# Allegro board iTOP4412_convertor_4.3Clasics_v1_5.brd
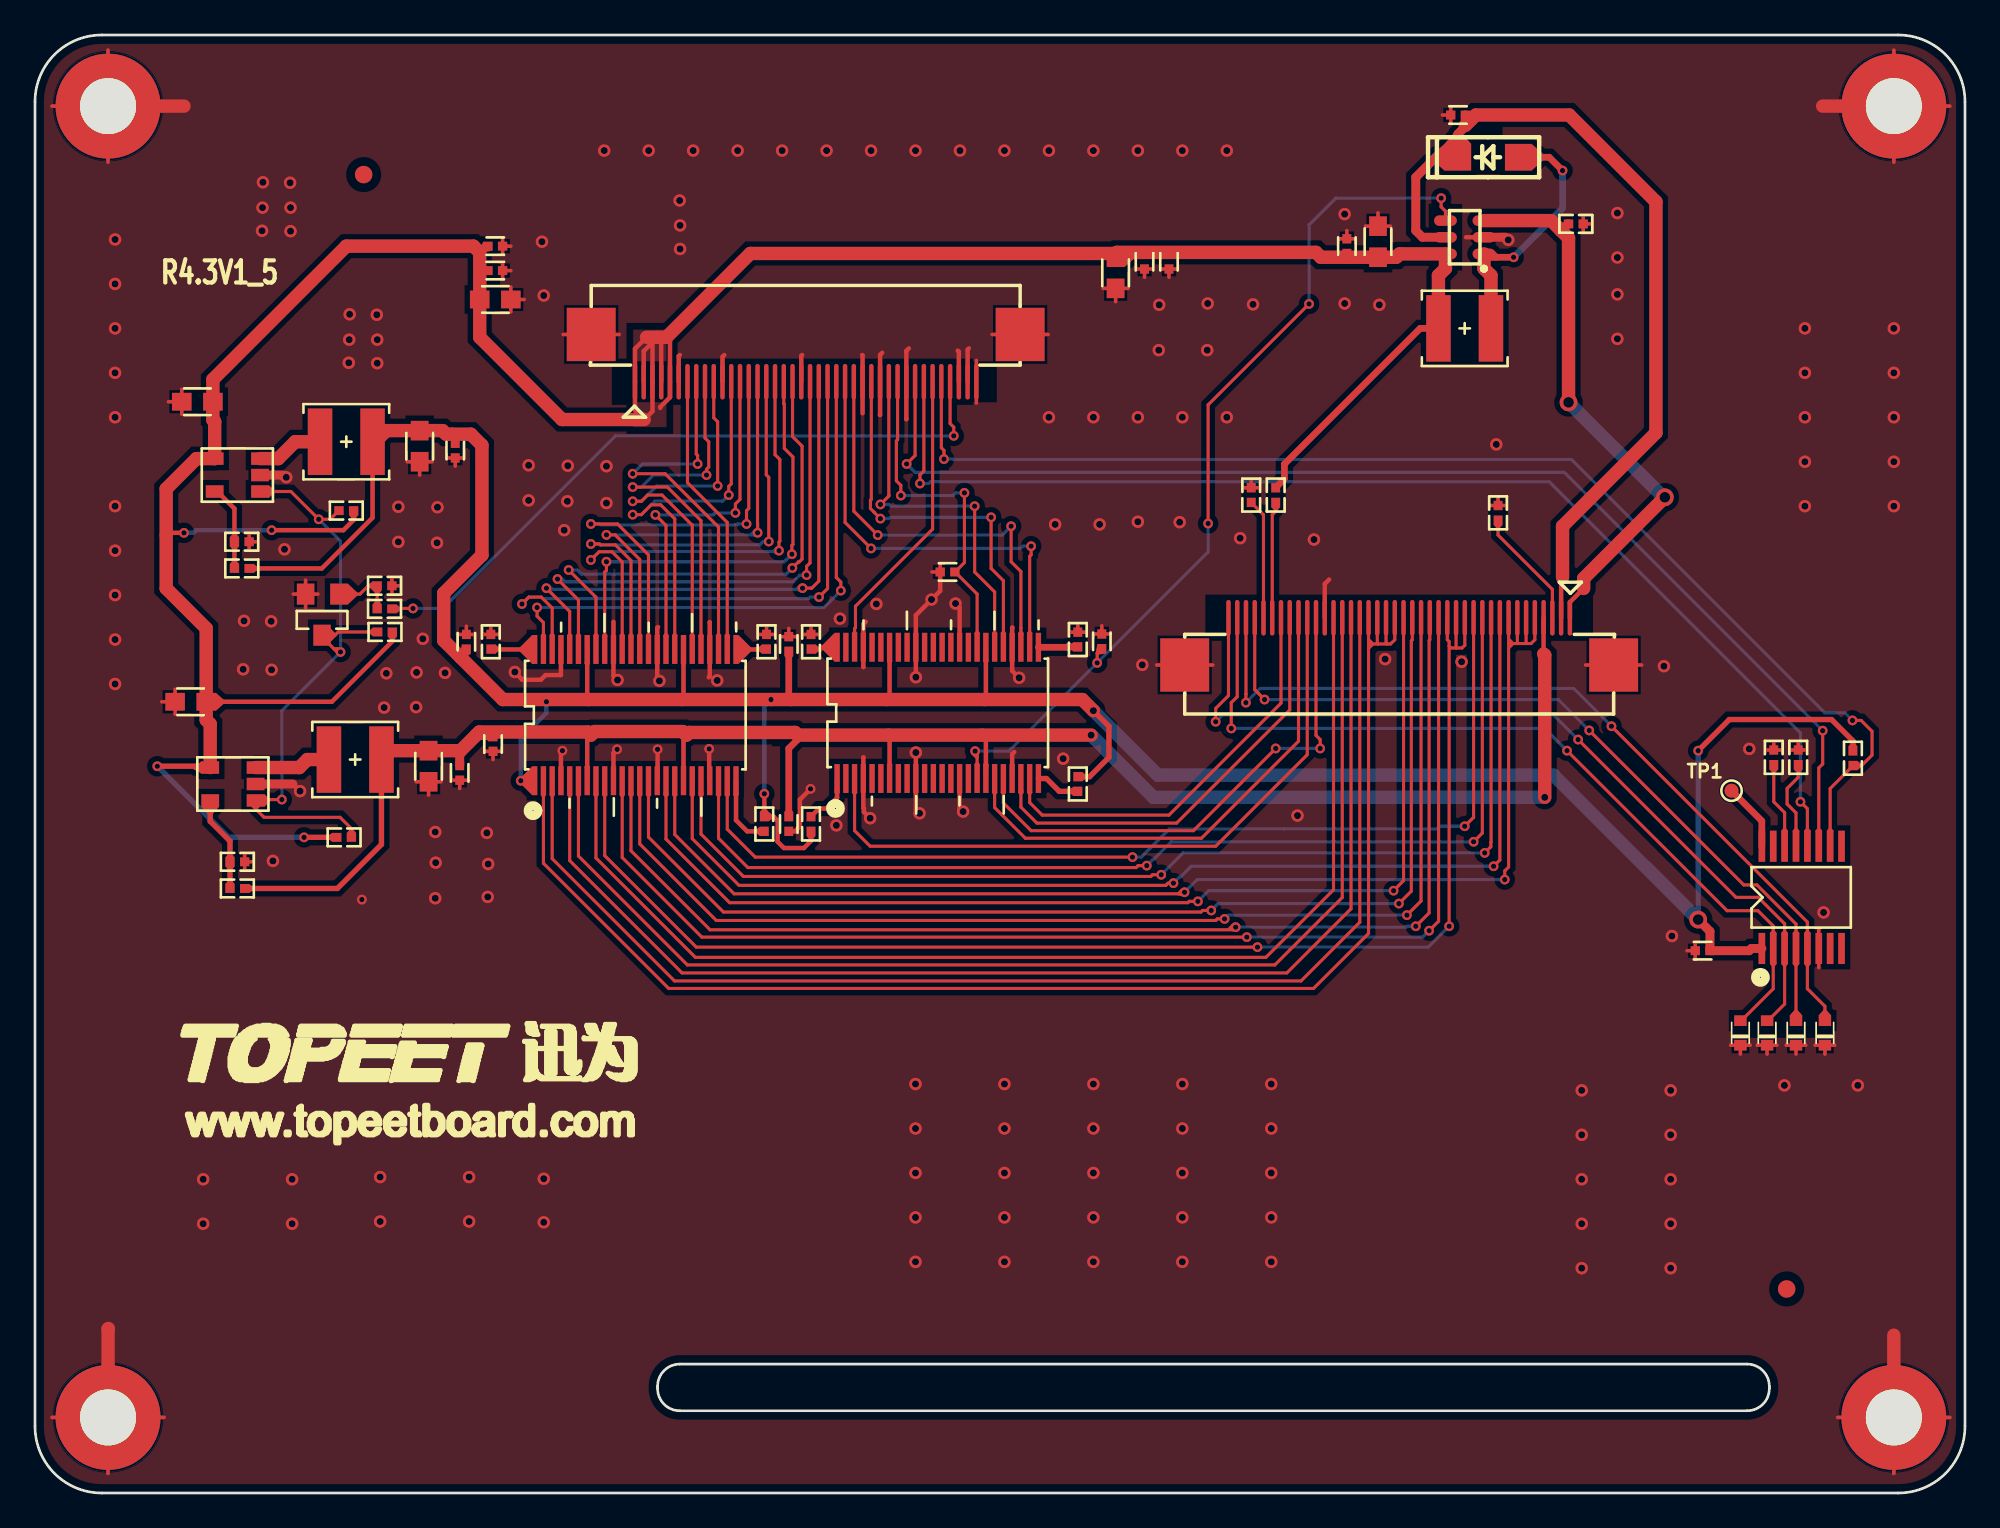
[diagram p0: board, top side]
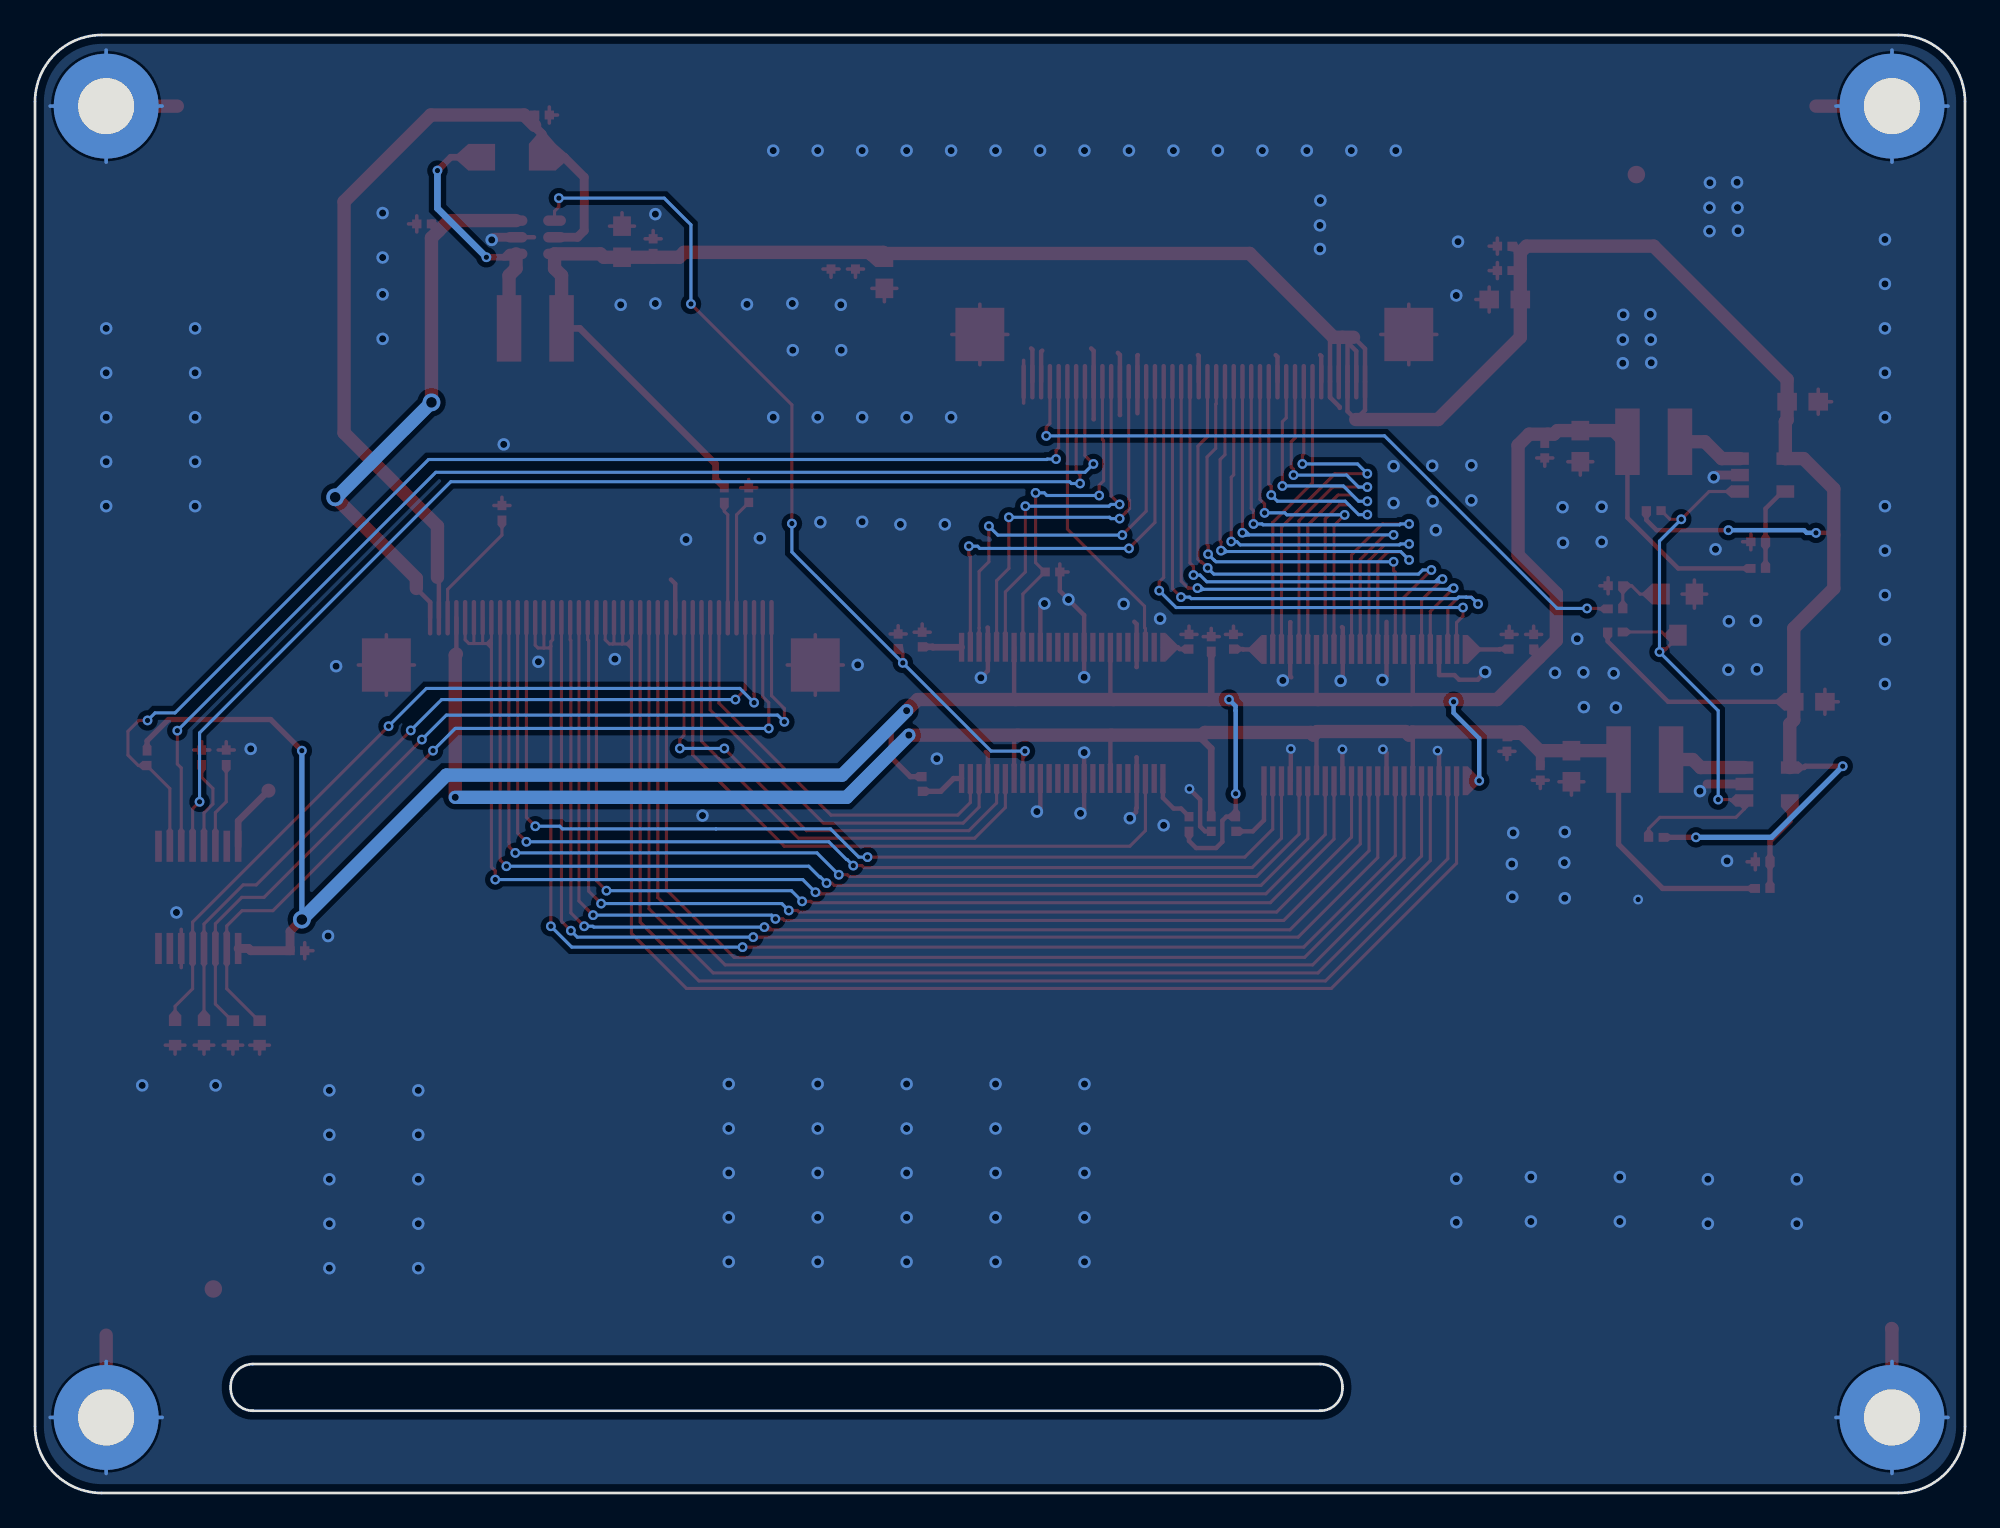
[diagram p1: board, bottom side, seen from below]

Outline 110.24 x 83.31 mm; copper layers: TOP, BOTTOM. Coordinates in mm from the lower left corner of the outline.
Outline path: 0,79.5 arc(1.12,82.2) 3.81,83.31 106.43,83.31 arc(109.12,82.2) 110.24,79.5 110.24,3.81 arc(109.12,1.12) 106.43,0 3.81,0 arc(1.12,1.12) 0,3.81 0,79.5 ; 35.56,6.1 35.56,5.97 arc(35.93,5.07) 36.83,4.7 97.79,4.7 arc(98.69,5.07) 99.06,5.97 99.06,6.1 arc(98.69,6.99) 97.79,7.37 36.83,7.37 arc(35.93,6.99) 35.56,6.1

## Design rules (mm)
net group PWR_PH: nets DC33V
nets with their own width: min track width 0.254; nets GND VSYS

## Placement (name value [footprint] x y rotation side)
C1  10uF/16V  [C0603]  76.71 71.5 90 top
C2  0.1uF  [C0402]  74.93 71.25 270 top
C3  1uF/25V  [C0402]  81.28 78.74 0 top
C5  4.7uF  [C0603]  9.27 62.36 0 top
C6  10uF  [C0603]  21.97 59.82 90 top
C7  0.1uF  [C0402]  24 59.56 90 top
C8  4.7uF  [C0603]  8.89 45.21 0 top
C9  10uF  [C0603]  22.48 41.53 90 top
C10  0.1uF  [C0402]  24.26 41.15 90 top
C11  10uF  [C0603]  26.29 68.2 0 top
C12  1uF  [C0402]  26.29 69.85 0 top
C13  0.1uF  [C0402]  26.29 71.25 0 top
C14  10uF  [C0603]  61.72 69.72 270 top
C15  100nF  [C0402]  64.77 70.36 270 top
C16  100nF  [C0402]  63.37 70.36 270 top
C17  0.1uF  [C0402]  95.25 30.99 180 top
C18  0.1uF  [C0402]  24.64 48.64 90 top
C19  0.1uF  [C0402]  43.05 48.51 90 top
C20  0.1uF  [C0402]  43.05 38.23 270 top
C21  0.1uF  [C0402]  26.16 42.8 270 top
C22  0.1uF  [C0402]  60.93 48.67 270 top
C23  0.1uF  [C0402]  52.12 52.63 0 top
CON1  CON40_0_5MM  [FPC40-050]  44.02 63.5 0 top
CON2  CON40_0_5MM  [FPC40-050]  77.92 50.01 180 top
D1  IN5819  [D1206]  82.99 76.33 0 top
D2  BZX84C10/SOT  [SOD-523]  102.23 26.29 90 top
D3  BZX84C10/SOT  [SOD-523]  98.93 26.29 90 top
D4  BZX84C10/SOT  [SOD-523]  100.58 26.29 90 top
D5  BZX84C10/SOT  [SOD-523]  97.41 26.29 90 top
H1  TP_P0_0.8_D0  [HOLE3_2X6]  4.17 79.25 0 top
H2  TP_P0_0.8_D0  [HOLE3_2X6]  106.17 4.32 0 top
H3  TP_P0_0.8_D0  [HOLE3_2X6]  106.17 79.25 0 top
H4  TP_P0_0.8_D0  [HOLE3_2X6]  4.17 4.32 0 top
L1  10uH  [IND4018]  81.66 66.55 0 top
L2  2.2uH  [IND4018]  17.78 60.07 0 top
L3  2.2uH  [IND4018]  18.29 41.91 0 top
NOREF  -  [unnamed]  100.05 11.66 0 top
NOREF#2  -  [unnamed]  18.77 75.34 0 top
Q1  L9014  [SOT-23]  16.4 50.2 0 top
R1  5.1R  [R0402]  88.01 72.52 0 top
R3  ? 1%  [R0402]  11.81 52.83 180 top
R8  ? 1%  [R0402]  11.81 54.36 0 top
R9  430K 1%  [R0402]  11.56 34.54 180 top
R10  100K 1%  [R0402]  11.56 36.07 0 top
R11  0R  [R0402]  100.71 42.04 90 top
R12  0R  [R0402]  99.31 42.04 90 top
R13  10K  [R0402]  103.84 41.99 90 top
R15  NC  [R0402]  17.78 56.13 0 top
R16  NC  [R0402]  17.65 37.47 180 top
R17  10K/NC  [R0402]  83.57 56.01 90 top
R18  0R  [R0402]  70.87 57.02 90 top
R19  10K/NC  [R0402]  69.47 57.02 90 top
R20  10K  [R0402]  26.03 48.64 90 top
R21  10K  [R0402]  44.32 38.23 270 top
R22  10K  [R0402]  44.32 48.64 270 top
R23  10K  [R0402]  59.56 40.51 90 top
R24  10K  [R0402]  41.66 38.23 90 top
R25  10K  [R0402]  59.56 48.77 90 top
R26  10K  [R0402]  41.78 48.64 90 top
R27  10K  [R0402]  19.99 49.2 180 top
R28  1K  [R0402]  19.96 50.52 0 top
R29  10K  [R0402]  19.96 51.84 0 top
TP1  AUX  [TP0_8-SMD]  96.9 40.13 0 top
U1  TP3984  [SOT23-6L]  81.66 71.76 90 top
U3  RT8059  [TSOT-23-5]  11.56 58.17 90 top
U4  RT8059  [TSOT-23-5]  11.3 40.51 90 top
U5  TSC2007IPW  [TSSOP16]  100.58 34.04 90 top
U6  U-74ALVC164245DGG  [TSSOP_48]  34.29 44.45 0 top
U7  U-74ALVC164245DGG  [TSSOP_48]  51.56 44.58 0 top

## Library data of the parts
C1 = CAP POL
C2 C3 C5-C10 C22 = C1005
C11 C14 = C1608
C12 C13 C15 C16 = C0402_0
C17-C21 C23 = C0603_0
CON1 CON2 = CON40_0_1
D1 = DIODE SCHOTTKY
D2-D5 = BZX84C10/SOT_1
H1-H4 TP1 = TP_P0_0.8_D0
L1-L3 = LQH32C_1
Q1 = L14P2/TO_1
R1 R3 R8-R10 = R1005_0
R11-R13 R15-R26 = R0603_0
R27-R29 = R
U1 = TP3984: User Part Number: pn; Tolerance: RichardLC
U3 U4 = RT8059
U5 = U-TSC2007IPW
U6 U7 = U-74ALVC164245DGG

## Footprints (pads in the part's own frame, mm; a bottom-side part is the same pattern mirrored in y, then rotated)
C0402
  rect 0.533x0.508 smd: 1(-0.419,0) 2(0.419,0)
C0603
  rect 1.118x1.016 smd: 1(-0.889,0) 2(0.889,0)
D1206
  rect 1.524x1.524 smd: 1(1.727,0) 2(-1.727,0)
FPC40-050
  oval 0.254x2.032 smd: 1(-9.75,0) 2(-9.25,0) 3(-8.75,0) 4(-8.25,0) 5(-7.75,0) 6(-7.25,0) 7(-6.75,0) 8(-6.25,0) 9(-5.75,0) 10(-5.25,0) 11(-4.75,0) 12(-4.25,0) 13(-3.75,0) 14(-3.25,0) 15(-2.75,0) 16(-2.25,0) 17(-1.75,0) 18(-1.25,0) 19(-0.75,0) 20(-0.25,0) 21(0.25,0) 22(0.75,0) 23(1.25,0) 24(1.75,0) 25(2.25,0) 26(2.75,0) 27(3.25,0) 28(3.75,0) 29(4.25,0) 30(4.75,0) 31(5.25,0) 32(5.75,0) 33(6.25,0) 34(6.75,0) 35(7.25,0) 36(7.75,0) 37(8.25,0) 38(8.75,0) 39(9.25,0) 40(9.75,0)
  rect 2.794x3.048 smd: 41(-12.25,2.7) 42(12.25,2.7)
HOLE3_2X6
  round 5.994 hole 3.2: 1(0,0)
IND4018
  rect 1.4x3.8 smd: 1(-1.5,0) 2(1.5,0)
R0402
  rect 0.533x0.508 smd: 1(-0.419,0) 2(0.419,0)
SOD-523
  rect 0.61x0.71 smd: 1(-0.7,0) 2(0.7,0)
SOT23-6L
  oval 0.6x1.3 smd: 1(-0.95,-1.1) 2(0,-1.1) 3(0.95,-1.1) 4(0.95,1.1) 5(0,1.1) 6(-0.95,1.1)
SOT-23
  rect 1x1.2 smd: 1(0.965,1.168) 2(-0.94,1.168) 3(0,-1.181)
TP0_8-SMD
  round 0.8 smd: 1(0,0)
TSOT-23-5
  rect 0.711x1.016 smd: 1(-0.94,-1.295) 2(0,-1.295) 3(0.94,-1.295) 4(0.94,1.295) 5(-0.94,1.295)
TSSOP16
  rect 1.778x0.381 smd: 1(-2.921,1.951) 2(-2.921,1.301) 3(-2.921,0.65) 4(-2.921,0) 5(-2.921,-0.65) 6(-2.921,-1.301) 7(-2.921,-1.951) 8(-2.921,-2.601) 9(2.921,-2.601) 10(2.921,-1.951) 11(2.921,-1.301) 12(2.921,-0.65) 13(2.921,0) 14(2.921,0.65) 15(2.921,1.301) 16(2.921,1.951)
TSSOP_48
  rect 0.305x1.651 smd: 1(-5.75,-3.75) 2(-5.25,-3.75) 3(-4.75,-3.75) 4(-4.25,-3.75) 5(-3.75,-3.75) 6(-3.25,-3.75) 7(-2.75,-3.75) 8(-2.25,-3.75) 9(-1.75,-3.75) 10(-1.25,-3.75) 11(-0.75,-3.75) 12(-0.25,-3.75) 13(0.25,-3.75) 14(0.75,-3.75) 15(1.25,-3.75) 16(1.75,-3.75) 17(2.25,-3.75) 18(2.75,-3.75) 19(3.25,-3.75) 20(3.75,-3.75) 21(4.25,-3.75) 22(4.75,-3.75) 23(5.25,-3.75) 24(5.75,-3.75) 25(5.75,3.75) 26(5.25,3.75) 27(4.75,3.75) 28(4.25,3.75) 29(3.75,3.75) 30(3.25,3.75) 31(2.75,3.75) 32(2.25,3.75) 33(1.75,3.75) 34(1.25,3.75) 35(0.75,3.75) 36(0.25,3.75) 37(-0.25,3.75) 38(-0.75,3.75) 39(-1.25,3.75) 40(-1.75,3.75) 41(-2.25,3.75) 42(-2.75,3.75) 43(-3.25,3.75) 44(-3.75,3.75) 45(-4.25,3.75) 46(-4.75,3.75) 47(-5.25,3.75) 48(-5.75,3.75)
unnamed
  round 1 smd: (0,0)

## Nets
GND: C1.2 C2.1 C3.1 C5.1 C6.1 C7.1 C8.1 C9.1 C10.1 C11.2 C12.2 C13.2 C14.2 C15.2 C16.2 C17.2 C18.2 C19.2 C20.2 C21.2 C22.1 C23.1 CON1.6 CON1.11 CON1.20 CON1.27 CON1.29 CON1.32 CON1.38 CON1.39 CON1.40 CON1.41 CON1.42 CON2.29 CON2.41 CON2.42 D2.1(ANODE) D3.1(ANODE) D4.1(ANODE) D5.1(ANODE) H1.1 H2.1 H3.1 H4.1 Q1.2(EMITTER) R1.2 R8.2 R10.2 R11.2 R12.2 R17.2 R19.2 R20.2 R22.1 R25.2 R26.2 R29.2 U1.2(GND) U3.2(GND) U4.2(GND) U5.6(GND) U6.4(VSS_1) U6.10(VSS_2) U6.15(VSS_3) U6.21(VSS_4) U6.28(VSS_5) U6.34(VSS_6) U6.39(VSS_7) U6.45(VSS_8) U7.4(VSS_1) U7.10(VSS_2) U7.15(VSS_3) U7.21(VSS_4) U7.28(VSS_5) U7.34(VSS_6) U7.39(VSS_7) U7.45(VSS_8)
VDD18: C6.2 C7.2 C17.1 C18.1 C19.1 L2.2 R3.1 R13.2 R21.2 R23.2 R24.2 U5.1(VDD/REF) U6.1(1DIR) U6.31(VCC_A1) U6.42(VCC_A2) U7.31(VCC_A1) U7.42(VCC_A2)
BUF_LCD_DEN: CON2.34 U7.23(2B8)
BUF_LCD_HSYNC: CON2.32 U7.19(2B5)
BUF_LCD_VD3: CON2.21 CON2.22 CON2.23 CON2.24 U6.2(1B1)
BUF_LCD_VD4: CON2.25 U6.3(1B2)
BUF_LCD_VD5: CON2.26 U6.5(1B3)
BUF_LCD_VD6: CON2.27 U6.6(1B4)
BUF_LCD_VD7: CON2.28 U6.8(1B5)
BUF_LCD_VD10: CON2.13 CON2.14 CON2.15 U6.9(1B6)
BUF_LCD_VD11: CON2.16 U6.11(1B7)
BUF_LCD_VD12: CON2.17 U6.12(1B8)
BUF_LCD_VD13: CON2.18 U6.13(2B1)
BUF_LCD_VD14: CON2.19 U6.14(2B2)
BUF_LCD_VD15: CON2.20 U6.16(2B3)
BUF_LCD_VD19: CON2.5 CON2.6 CON2.7 CON2.8 U6.17(2B4)
BUF_LCD_VD20: CON2.9 U6.19(2B5)
BUF_LCD_VD21: CON2.10 U6.20(2B6)
BUF_LCD_VD22: CON2.11 U6.22(2B7)
BUF_LCD_VD23: CON2.12 U6.23(2B8)
BUF_LCD_VOTCLK: CON2.30 U7.20(2B6)
BUF_LCD_VSYNC: CON2.33 U7.22(2B7)
BUF_MD_RSTN: CON2.31 U7.3(1B2)
BUF_XPWMTOUT1: C22.2 U1.4(EN) U7.17(2B4)
CAM5M_RST: CON1.37 R28.2
DC33V: C9.2 C10.2 C20.1 C21.1 CON2.4 L3.2 R9.1 U6.7(VCC_B1) U6.18(VCC_B2) U7.7(VCC_B1) U7.18(VCC_B2)
GPX0_0: CON1.36 R13.1 U5.10(PENIRQ)
I2C_SCL7: CON1.34 U5.12(SCL)
I2C_SDA7: CON1.33 U5.11(SDA)
LCD_DEN: CON1.25 U7.26(2A8)
LCD_HSYNC: CON1.30 U7.30(2A5)
LCD_VD3: CON1.24 U6.47(1A1)
LCD_VD4: CON1.23 U6.46(1A2)
LCD_VD5: CON1.22 U6.44(1A3)
LCD_VD6: CON1.21 U6.43(1A4)
LCD_VD7: CON1.19 U6.41(1A5)
LCD_VD10: CON1.18 U6.40(1A6)
LCD_VD11: CON1.17 U6.38(1A7)
LCD_VD12: CON1.16 U6.37(1A8)
LCD_VD13: CON1.15 U6.36(2A1)
LCD_VD14: CON1.14 U6.35(2A2)
LCD_VD15: CON1.13 U6.33(2A3)
LCD_VD19: CON1.12 U6.32(2A4)
LCD_VD20: CON1.10 U6.30(2A5)
LCD_VD21: CON1.9 U6.29(2A6)
LCD_VD22: CON1.8 U6.27(2A7)
LCD_VD23: CON1.7 U6.26(2A8)
LCD_VOTCLK: CON1.28 U7.29(2A6)
LCD_VSYNC: CON1.26 U7.27(2A7)
LED+: C3.2 CON2.2 D1.2(CATHODE) U1.5(OUT)
LED-: CON2.1 R1.1 U1.3(FB)
MD_RSTN: CON1.35 U7.46(1A2)
TP_EN: Q1.3(COLLECTOR) R15.1 R16.1 R27.2 U3.1(EN) U4.1(EN)
VSYS: C1.1 C2.2 C5.2 C8.2 C11.1 C12.1 C13.1 C14.1 C15.1 C16.1 CON1.1 CON1.2 CON1.3 CON1.4 CON1.5 L1.1 R15.2 R16.2 R18.2 R27.1 U1.6(IN) U3.4(VIN) U4.4(VIN)
XM: CON2.37 D4.2(CATHODE) U5.4(X-)
XP: CON2.39 D5.2(CATHODE) U5.2(X+)
XPWMTOUT1: C23.2 CON1.31 U7.32(2A4)
YM: CON2.38 D2.2(CATHODE) U5.5(Y-)
YP: CON2.40 D3.2(CATHODE) U5.3(Y+)
N02294: R11.1 U5.13(A1)
N02298: R12.1 U5.14(A0)
N02404: TP1.1 U5.16(AUX)
N321884: L2.1 U3.3(LX)
N321888: R3.2 R8.1 U3.5(FB)
N322800: L3.1 U4.3(LX)
N322804: R9.2 R10.1 U4.5(FB)
N323503: D1.1(ANODE) L1.2 U1.1(LX)
N332264: CON2.3 R17.1
N334265: CON2.35 R18.1
N334269: CON2.36 R19.1
N337628: R25.1 U7.25(2NOE)
N337730: R23.1 U7.24(2DIR)
N337734: R21.1 U7.1(1DIR)
N338218: R24.1 U6.24(2DIR)
N338394: R22.2 U7.48(1NOE)
N338646: R20.1 U6.48(1NOE)
N338650: R26.1 U6.25(2NOE)
N362187: Q1.1(BASE) R28.1 R29.1

Pads without a net: U5 7 8 9 15; U7 2 5 6 8 9 11 12 13 14 16 33 35 36 37 38 40 41 43 44 47

## Via types
v1: diameter 1.016, hole 0.61, TOP to BOTTOM, 3 vias
v2: diameter 0.559, hole 0.305, TOP to BOTTOM, 105 vias
v3: diameter 0.711, hole 0.406, TOP to BOTTOM, 182 vias

## Routing (per net, layer and track width the routed paths; a pad name or vN(x,y) marks a point on that pad's centre or on a via; arc(x,y) is an arc through that point)
GND: length 278
  TOP w0.203: 8,45.21 8,45.92 ; 8,45.21 7.24,45.21 ; 8,45.21 8,44.5 ; R26.2 41.78,49.53 ; R26.2 42.24,49.06 ; R26.2 41.33,49.06 ; 21.77,40.64 C9.1 ; C9.1 23.19,40.64 ; C9.1 22.48,39.88 ; 4.17,76.05 H1.1 ; H1.1 4.17,82.45 ; H1.1 0.97,79.25 ; C7.1 24.46,59.14 ; C7.1 23.55,59.14 ; C7.1 24,58.67 ; R25.2 60.02,49.19 ; R25.2 59.56,49.66 ; R25.2 59.11,49.19 ; R22.1 44.32,49.53 ; R22.1 43.87,49.06 ; R22.1 44.78,49.06 ; C17.2 94.83,31.45 ; C17.2 94.83,30.53 ; C17.2 94.36,30.99 ; 27.18,67.49 C11.2 ; C11.2 27.94,68.2 ; C11.2 27.18,68.91 ; C10.1 24.71,40.73 ; C10.1 23.8,40.73 ; C10.1 24.26,40.26 ; 61.01,68.83 C14.2 ; C14.2 61.72,68.07 ; C14.2 62.43,68.83 ; 53.77,62.28 CON1.40 53.77,64.72 ; CON2.41 91.77,47.31 ; CON2.41 88.57,47.31 ; CON2.41 90.17,45.59 ; CON2.41 90.17,49.04 ; 69.01,57.44 R19.2 ; R19.2 69.47,57.91 ; R19.2 69.93,57.44 ; C19.2 43.05,49.4 ; C19.2 42.6,48.93 ; C19.2 43.51,48.93 ; 65.67,45.59 CON2.42 ; CON2.42 65.67,49.04 ; CON2.42 64.07,47.31 ; CON2.42 67.27,47.31 ; R8.2 12.23,54.81 ; R8.2 12.23,53.9 ; R8.2 12.7,54.36 ; D5.1 97.97,25.59 ; D5.1 96.85,25.59 ; D5.1 97.41,25.08 ; 80.86,78.28 C3.1 ; C3.1 80.86,79.2 ; C3.1 80.39,78.74 ; 102.23,25.08 D2.1 ; D2.1 101.68,25.59 ; D2.1 102.79,25.59 ; R11.2 101.17,42.46 ; R11.2 100.25,42.46 ; R11.2 100.71,42.93 ; 0.97,4.32 H4.1 ; H4.1 4.17,1.12 ; H4.1 7.37,4.32 ; C22.1 60.93,49.56 ; C22.1 60.48,49.09 ; C22.1 61.39,49.09 ; 51.23,52.63 C23.1 51.7,53.09 ; R1.2 88.43,72.97 ; R1.2 88.9,72.52 ; R1.2 88.43,72.06 ; 30.17,66.2 CON1.41 ; CON1.41 31.77,64.47 ; CON1.41 31.77,67.93 ; CON1.41 33.37,66.2 ; C1.2 76.71,73.15 ; C1.2 77.42,72.39 ; C1.2 76,72.39 ; 7.62,62.36 C5.1 ; C5.1 8.38,63.07 ; C5.1 8.38,61.65 ; H3.1 106.17,82.45 ; H3.1 109.37,79.25 ; H3.1 106.17,76.05 ; 26.16,41.91 C21.2 ; C21.2 26.62,42.38 ; C21.2 25.7,42.38 ; R10.2 11.98,36.53 ; R10.2 12.45,36.07 ; R10.2 11.98,35.61 ; C2.1 75.39,71.67 ; C2.1 74.47,71.67 ; C2.1 74.93,72.14 ; 101.88,32.21 U5.6 101.88,30.02 ; C13.2 26.71,71.7 ; C13.2 26.71,70.79 ; C13.2 27.18,71.25 ; 14.75,51.37 Q1.2 ; Q1.2 15.46,50.56 ; Q1.2 15.46,52.17 ; Q1.2 16.16,51.37 ; C12.2 26.71,70.31 ; C12.2 26.71,69.39 ; C12.2 27.18,69.85 ; C15.2 65.23,69.94 ; C15.2 64.77,69.47 ; C15.2 64.31,69.94 ; R12.2 99.31,42.93 ; R12.2 99.77,42.46 ; R12.2 98.86,42.46 ; 56.27,64.47 CON1.42 ; CON1.42 57.87,66.2 ; CON1.42 56.27,67.93 ; CON1.42 54.67,66.2 ; 98.37,25.59 D3.1 ; D3.1 98.93,25.08 ; D3.1 99.49,25.59 ; 63.37,69.47 C16.2 ; C16.2 62.92,69.94 ; C16.2 63.83,69.94 ; R29.2 20.38,52.3 ; R29.2 20.38,51.38 ; R29.2 20.85,51.84 ; C18.2 24.64,49.53 ; C18.2 25.1,49.06 ; C18.2 24.18,49.06 ; 25.58,49.06 R20.2 ; R20.2 26.49,49.06 ; R20.2 26.03,49.53 ; 83.11,56.43 R17.2 ; R17.2 84.02,56.43 ; R17.2 83.57,56.9 ; 21.97,58.17 C6.1 ; C6.1 22.68,58.93 ; C6.1 21.26,58.93 ; H2.1 109.37,4.32 ; H2.1 102.97,4.32 ; H2.1 106.17,1.12 ; 100.58,25.08 D4.1 ; D4.1 100.03,25.59 ; D4.1 101.14,25.59
  TOP w0.254: v3(84.15,71.6) 84,71.76 ; 36.83,65.02 36.77,64.96 CON1.6 ; 48.26,61.6 48.27,61.6 CON1.29 48.27,65.03 48.39,65.15 ; U6.15 35.56,40.72 v2(35.56,42.49) ; 35.59,49.48 35.54,49.43 U6.34 35.54,46.53 v3(35.66,46.41) ; U6.21 38.51,40.73 v2(38.51,42.52) ; v3(33.27,46.46) 33.04,46.69 U6.39 33.04,49.78 ; 43.81,65.02 43.77,64.98 CON1.20 ; 81.74,71.76 U1.2 ; 49.77,61.36 CON1.32 49.77,65.26 49.91,65.41 ; 47.45,49.78 47.31,49.65 U7.45 47.31,47.2 47.32,47.19 ; 55.83,49.45 55.81,49.44 U7.28 55.81,46.98 v3(56.21,46.58) ; v3(15.14,40.11) 14.73,40.51 ; CON1.38 52.77,65.21 52.7,65.28 ; v3(14.35,58.04) 14.22,58.17 ; v3(53.01,38.94) 52.81,39.14 U7.15 ; 47.24,65.02 47.27,65 CON1.27 47.27,61.7 ; CON1.39 53.27,65.33 53.34,65.41 ; C23.1 51.7,51.55 v3(51.21,51.05) 50.31,50.16 U7.39 v3(50.31,46.61) ; 39.37,65.02 39.27,64.92 CON1.11 ; U6.4 30.04,42.33 v2(30.12,42.42) ; v3(52.58,50.83) 52.81,50.59 U7.34 ; 38.53,49.76 38.54,49.75 U6.28 38.54,46.67 38.48,46.61 ; 55.93,42.34 55.81,42.22 U7.21 ; v2(33.25,42.49) 33.04,42.29 U6.10 ; v3(50.31,42.31) U7.10 50.31,39.05 v3(50.52,38.84) ; 47.32,42.04 47.31,42.03 U7.4 47.31,39.15 47.35,39.12 47.35,38.91 v3(47.7,38.56) ; CON2.29 73.67,51.95 73.91,52.2 ; U6.45 30.04,46.75 30.02,46.74 29.16,46.74 28.89,46.47 27.83,46.47 v3(27.41,46.91) ; v2(44.3,40.23) 43.69,39.62 43.69,38.09 43.41,37.81 C20.2
  TOP w0.508: 84,71.76 U1.2 ; 14.73,40.51 U4.2 ; 14.22,58.17 U3.2
  TOP w0.762: H4.1 4.17,9.38 4.19,9.4 ; 8.51,79.25 H1.1 ; 102.11,79.25 H3.1 ; 106.17,9.02 H2.1
  BOTTOM w0.203: H4.1 4.17,7.52 ; H4.1 0.97,4.32 ; H4.1 4.17,1.12 ; H4.1 7.37,4.32 ; 102.97,79.25 H3.1 ; H3.1 106.17,82.45 ; H3.1 109.37,79.25 ; H3.1 106.17,76.05 ; H1.1 7.37,79.25 ; H1.1 4.17,76.05 ; H1.1 4.17,82.45 ; H1.1 0.97,79.25 ; H2.1 106.17,7.52 ; H2.1 109.37,4.32 ; H2.1 106.17,1.12 ; H2.1 102.97,4.32
  vias: v2(18.67,33.91) v3(4.57,71.63) v3(4.57,69.09) v3(4.57,66.55) v3(4.57,64.01) v3(4.57,61.47) v3(4.57,56.39) v3(4.57,53.85) v3(4.57,51.31) v3(4.57,48.77) v3(4.57,46.23) v3(9.6,17.93) v3(9.6,15.39) v3(11.89,47.07) v3(11.94,49.83) v3(13.02,74.9) v3(12.99,73.45) v3(12.97,72.13) v3(13.49,49.81) v3(13.51,47.04) v3(13.59,36.12) v3(14.25,53.92) v3(14.57,74.87) v3(14.59,73.45) v3(14.59,72.1) v3(14.68,17.93) v3(14.68,15.39) v3(17.92,64.58) v3(17.97,67.35) v3(17.95,65.9) v3(19.52,67.33) v3(19.55,65.9) v3(19.55,64.56) v3(19.71,18.05) v3(19.71,15.51) v3(19.94,44.88) v3(20.07,46.84) v3(20.75,56.35) v3(20.75,54.35) v3(21.79,46.89) v3(21.77,44.91) v3(22.15,48.81) v3(22.86,37.77) v3(22.89,36.02) v3(22.86,33.99) v3(22.99,56.33) v3(22.96,54.3) v3(23.42,46.86) v3(24.79,18.05) v3(24.79,15.51) v3(25.81,37.72) v3(25.88,35.94) v3(25.86,34.06) v3(28.19,58.72) v3(28.19,56.72) v3(28.96,71.5) v3(29.06,68.43) v3(29.06,17.96) v3(29.06,15.47) v3(30.23,55.02) v3(30.4,56.67) v3(30.43,58.7) v3(32.51,76.71) v3(32.64,58.67) v3(32.64,56.57) v3(35.05,76.71) v3(36.82,73.85) v3(36.84,72.43) v3(36.84,71.09) v3(37.59,76.71) v3(38.96,46.43) v3(40.13,76.71) v3(42.67,76.71) v3(45.21,76.71) v3(45.77,38.15) v3(45.97,49.96) v3(47.75,76.71) v3(48.06,50.8) v3(50.29,76.71) v3(50.29,23.37) v3(50.29,20.83) v3(50.29,18.29) v3(50.29,15.75) v3(50.29,13.21) v3(52.83,76.71) v3(55.37,76.71) v3(55.37,23.37) v3(55.37,20.83) v3(55.37,18.29) v3(55.37,15.75) v3(55.37,13.21) v3(57.91,76.71) v3(57.91,61.47) v3(58.27,55.35) v3(58.72,41.96) v3(60.45,76.71) v3(60.45,61.47) v3(60.45,23.37) v3(60.45,20.83) v3(60.45,18.29) v3(60.45,15.75) v3(60.45,13.21) v3(60.81,55.35) v3(62.99,76.71) v3(62.99,61.47) v3(62.99,55.5) v3(63.25,47.32) v3(64.21,67.89) v3(64.19,65.3) v3(65.38,55.47) v3(65.53,76.71) v3(65.53,61.47) v3(65.53,23.37) v3(65.53,20.83) v3(65.53,18.29) v3(65.53,15.75) v3(65.53,13.21) v3(66.98,67.97) v3(66.95,65.3) v3(68.07,76.71) v3(68.07,61.47) v3(68.83,54.56) v3(69.57,67.92) v3(70.61,23.37) v3(70.61,20.83) v3(70.61,18.29) v3(70.61,15.75) v3(70.61,13.21) v3(72.11,38.71) v3(73.05,54.48) v3(74.8,73.08) v3(74.8,67.97) v3(76.78,67.89) v3(77.11,47.65) v3(81.48,47.5) v3(83.46,59.92) v3(88.34,23.01) v3(88.34,20.47) v3(88.34,17.93) v3(88.34,15.39) v3(88.34,12.85) v3(90.38,73.14) v3(90.38,70.6) v3(90.38,68.49) v3(90.38,65.95) v3(93.04,47.24) v3(93.5,31.83) v3(93.42,23.01) v3(93.42,20.47) v3(93.42,17.93) v3(93.42,15.39) v3(93.42,12.85) v3(97.92,42.52) v3(99.92,23.29) v3(101.09,66.55) v3(101.09,64.01) v3(101.09,61.47) v3(101.09,58.93) v3(101.09,56.39) v3(102.16,33.17) v3(104.11,23.29) v3(106.17,66.55) v3(106.17,64.01) v3(106.17,61.47) v3(106.17,58.93) v3(106.17,56.39)
VDD18: length 174
  TOP w0.254: 36.96,45.34 37.04,45.42 U6.31 ; R3.1 16.38,52.83 19.28,55.73 L2.2 ; v2(41.66,39.95) R24.2 42.19,38.65 42.42,38.42 42.42,37.21 42.77,36.86 43.92,36.86 44.32,37.26 R21.2 ; C18.1 24.64,48.03 24.33,47.73 ; U7.42 48.81,45.51 48.64,45.34 ; U7.31 54.31,45.42 54.23,45.34 ; U6.1 v2(27.75,40.7) ; 31.62,45.34 31.54,45.42 U6.42 ; v2(29.21,45.21) 29.21,45.34 ; 23.83,60.5 24,60.33 C7.2
  TOP w0.305: R23.2 60.24,40.93 61.34,42.04 61.34,43.82 v3(60.45,44.7) ; v2(95,42.42) 96.77,44.2 102.62,44.2 103.84,42.98 R13.2
  TOP w0.381: 43.18,45.34 43.05,45.47 C19.1
  TOP w0.508: v1(95,32.77) 95.67,32.09 C17.1 97.91,30.99 98.04,31.12 U5.1
  TOP w0.762: L2.2 19.53,60.33 19.69,60.33 20.07,60.71 C6.2 23.28,60.71 23.48,60.5 24.89,60.5 25.53,59.87 25.53,53.59 23.34,51.41 23.34,48.72 26.72,45.34 v2(42.04,45.34) 59.82,45.34 v3(60.45,44.7)
  BOTTOM w0.254: v2(27.75,40.7) 27.75,43.11 29.21,44.58 v2(29.21,45.21) ; v2(42.04,45.34) 41.66,44.96 41.66,44.71 41.66,44.7 v2(41.66,39.95)
  BOTTOM w0.305: v1(95,32.77) v2(95,42.42)
  BOTTOM w0.762: v3(60.45,44.7) 64.13,41.02 86.74,41.02 v1(95,32.77)
BUF_LCD_DEN: length 23.6
  TOP w0.178: U7.23 56.81,39.45 57.53,38.74 64.77,38.74 71.17,45.13 CON2.34
BUF_LCD_HSYNC: length 29.1
  TOP w0.178: CON2.32 72.17,42.96 66.62,37.41 56.57,37.41 54.81,39.17 U7.19
BUF_LCD_VD3: length 80.1
  TOP w0.178: 77.24,48.51 77.43,48.51 77.67,48.76 CON2.21 ; 77.24,48.51 76.71,48.51 ; 77.24,48.51 77.17,48.59 CON2.22 ; 76.71,48.51 76.17,48.51 ; 76.71,48.51 76.67,48.55 CON2.23 ; U6.2 29.04,35.98 36.19,28.83 73.03,28.83 76.17,31.97 76.17,48.51 ; 76.17,48.51 CON2.24
BUF_LCD_VD4: length 72.3
  TOP w0.178: CON2.25 75.67,32.62 72.31,29.26 36.53,29.26 29.54,36.25 U6.3
BUF_LCD_VD5: length 70
  TOP w0.178: U6.5 30.54,36.14 36.96,29.72 71.5,29.72 75.17,33.39 CON2.26
BUF_LCD_VD6: length 68.1
  TOP w0.178: U6.6 31.04,36.4 37.26,30.18 70.82,30.18 74.67,34.03 CON2.27
BUF_LCD_VD7: length 66
  TOP w0.178: U6.8 32.04,36.29 37.72,30.61 70.31,30.61 74.17,34.47 CON2.28
BUF_LCD_VD10: length 77.1
  TOP w0.178: 80.77,48.39 80.77,48.65 80.67,48.76 CON2.15 ; 80.77,48.39 80.87,48.29 81.18,48.29 ; 80.77,48.39 v2(80.77,32.39) ; CON2.13 81.67,48.44 81.51,48.29 81.18,48.29 ; U6.9 32.54,36.42 37.77,31.19 v2(69.82,31.19) ; CON2.14 81.17,48.3 81.18,48.29
  BOTTOM w0.178: v2(80.77,32.39) 79.58,31.19 v2(69.82,31.19)
BUF_LCD_VD11: length 70.6
  TOP w0.178: U6.11 33.54,36.31 38.09,31.76 v2(69.22,31.76) ; CON2.16 80.17,32.67 v2(79.63,32.13)
  BOTTOM w0.178: v2(69.22,31.76) 79.26,31.76 v2(79.63,32.13)
BUF_LCD_VD12: length 68.7
  TOP w0.178: v2(78.87,32.39) 79.63,33.15 79.63,48.72 79.67,48.76 CON2.17 ; U6.12 34.04,36.7 38.56,32.18 68.43,32.18 v2(68.58,32.33)
  BOTTOM w0.178: v2(78.87,32.39) 78.37,32.39 78.32,32.33 v2(68.58,32.33)
BUF_LCD_VD13: length 66.7
  TOP w0.178: v2(67.94,32.8) 67.53,32.8 67.44,32.72 38.91,32.72 34.54,37.09 U6.13 ; CON2.18 79.17,33.83 v2(78.36,33.02)
  BOTTOM w0.178: v2(78.36,33.02) 68.16,33.02 v2(67.94,32.8)
BUF_LCD_VD14: length 64.7
  TOP w0.178: v2(77.9,33.68) 78.61,34.39 78.61,48.7 78.67,48.76 CON2.19 ; U6.14 35.04,37.48 39.32,33.2 66.6,33.2 66.69,33.29 v2(67.18,33.29)
  BOTTOM w0.178: v2(77.9,33.68) 67.58,33.68 v2(67.18,33.29)
BUF_LCD_VD15: length 62.5
  TOP w0.178: U6.16 36.04,37.37 39.67,33.73 65.85,33.73 65.93,33.81 v2(66.42,33.81) ; CON2.20 78.17,34.99 v2(77.6,34.42)
  BOTTOM w0.178: v2(66.42,33.81) 67.03,34.42 v2(77.6,34.42)
BUF_LCD_VD19: length 73.1
  TOP w0.178: U6.17 36.54,37.63 39.93,34.24 65.57,34.24 v2(65.66,34.33) ; 84.17,48.54 84.66,48.54 ; 84.17,48.54 84.17,35.77 83.95,35.55 v2(83.95,35.05) ; 84.17,48.54 CON2.8 ; 84.66,48.54 85.17,48.54 ; 84.66,48.54 84.67,48.55 CON2.7 ; 85.17,48.54 85.17,48.54 CON2.6 ; 85.17,48.54 85.45,48.54 85.67,48.76 CON2.5
  BOTTOM w0.178: v2(65.66,34.33) 66.38,35.05 v2(83.95,35.05)
BUF_LCD_VD20: length 65
  TOP w0.178: v2(83.31,35.81) 83.67,36.17 CON2.9 ; U6.19 37.54,37.39 40.21,34.72 64.59,34.72 64.72,34.85 v2(65.02,34.85)
  BOTTOM w0.178: v2(83.31,35.81) 66.04,35.81 65.43,35.2 65.37,35.2 v2(65.02,34.85)
BUF_LCD_VD21: length 63
  TOP w0.178: U6.20 38.04,37.65 40.46,35.23 63.73,35.23 63.83,35.33 v2(64.33,35.33) ; CON2.10 83.17,37.19 83.15,37.18 83.15,36.93 v2(82.8,36.58)
  BOTTOM w0.178: v2(82.8,36.58) 65.57,36.58 v2(64.33,35.33)
BUF_LCD_VD22: length 60.7
  TOP w0.178: v2(63.5,35.85) 63,35.85 62.89,35.74 40.72,35.74 39.04,37.41 U6.22 ; v2(82.17,37.21) 82.67,37.71 CON2.11
  BOTTOM w0.178: v2(82.17,37.21) 64.9,37.21 63.89,36.2 63.85,36.2 v2(63.5,35.85)
BUF_LCD_VD23: length 58.4
  TOP w0.178: v2(81.66,38.1) 82.17,38.61 CON2.12 ; v2(62.69,36.33) 41.14,36.33 39.54,37.93 U6.23
  BOTTOM w0.178: v2(81.66,38.1) 80.26,38.1 80.11,37.95 71.34,37.95 64.79,37.95 63.18,36.33 v2(62.69,36.33)
BUF_LCD_VOTCLK: length 29.7
  TOP w0.178: CON2.30 73.17,43.29 73.41,43.05 v2(73.41,42.55) ; v2(70.87,42.55) 66.17,37.85 56.9,37.85 55.31,39.43 U7.20
  BOTTOM w0.178: v2(70.87,42.55) v2(73.41,42.55)
BUF_LCD_VSYNC: length 25.3
  TOP w0.178: CON2.33 71.67,44.74 65.2,38.28 57.23,38.28 56.31,39.19 U7.22
BUF_MD_RSTN: length 39.2
  TOP w0.178: U7.3 46.81,37.85 47.7,36.96 67.44,36.96 72.67,42.19 CON2.31
BUF_XPWMTOUT1: length 51.2
  TOP w0.178: C22.2 60.67,47.98 v2(60.67,47.43) ; v2(80.31,73.99) 80.31,73.49 80.56,73.25 U1.4 ; v2(72.77,67.95) 67.01,62.18 v2(67.01,55.4) ; U7.17 53.81,42.28 v2(53.7,42.39)
  BOTTOM w0.178: v2(72.77,67.95) 72.77,72.47 74.3,73.99 v2(80.31,73.99) ; v2(53.7,42.39) 55.63,42.39 v2(60.67,47.43) 67.01,53.77 v2(67.01,55.4)
CAM5M_RST: length 39.4
  TOP w0.178: v2(52.48,60.41) 52.48,60.9 52.27,61.11 CON1.37 ; v2(21.59,50.55) 20.92,50.55 20.89,50.52 R28.2
  BOTTOM w0.178: v2(52.48,60.41) 33.15,60.41 23.29,50.55 v2(21.59,50.55)
DC33V: length 110.1
  TOP w0.254: U7.7 48.81,43.26 48.77,43.31 ; 86.17,47.94 CON2.4 ; U7.18 54.31,43.1 54.1,43.31 ; U6.7 31.54,43.1 31.75,43.31 ; U6.18 37.04,43.14 37.21,43.31
  TOP w0.305: L3.2 19.79,37.06 17.27,34.54 R9.1
  TOP w0.381: 43.56,43.31 43.56,43.05 43.05,42.55 C20.1 ; 25.2,43.31 25.29,43.22 C21.1
  TOP w0.508: C10.2 24.26,42.37
  TOP w0.762: v3(86.23,39.75) 86.23,47.88 86.17,47.94 ; L3.2 20.3,42.42 C9.2 24.21,42.42 24.26,42.37 25.37,43.48 31.57,43.48 31.75,43.31 31.95,43.51 37.01,43.51 37.21,43.31 37.36,43.46 43.41,43.46 43.56,43.31 v3(60.32,43.31)
  BOTTOM w0.762: v3(86.23,39.75) 63.88,39.75 v3(60.32,43.31)
GPX0_0: length 71.8
  TOP w0.178: CON1.36 51.77,59.73 51.92,59.58 v2(51.92,59.08) ; v2(103.81,44.15) 104.31,44.15 104.93,43.52 104.93,42.16 104.33,41.57 R13.1 103.84,41.55 102.53,40.25 U5.10
  BOTTOM w0.178: v2(103.81,44.15) 103.38,44.58 102.23,44.58 87.76,59.06 52.44,59.06 52.41,59.08 v2(51.92,59.08)
I2C_SCL7: length 68.8
  TOP w0.178: U5.12 101.23,39.1 v2(100.84,39.5) ; CON1.34 50.77,58.4 50.55,58.18 v2(50.55,57.68)
  BOTTOM w0.178: v2(100.84,39.5) 100.84,43.43 86.49,57.79 51.14,57.79 51.04,57.68 v2(50.55,57.68)
I2C_SDA7: length 70.2
  TOP w0.178: v2(102.11,43.56) 102.11,41.66 101.88,41.43 U5.11 ; CON1.33 50.27,59.29 v2(49.78,58.8)
  BOTTOM w0.178: v2(102.11,43.56) 87.35,58.32 50.26,58.32 v2(49.78,58.8)
LCD_DEN: length 25.1
  TOP w0.178: v2(56.9,54.1) 56.9,53.61 56.81,53.52 U7.26 ; CON1.25 46.27,55.46 v2(47.75,53.98)
  BOTTOM w0.178: v2(56.9,54.1) 56.4,54.1 56.27,53.98 v2(47.75,53.98)
LCD_HSYNC: length 21.2
  TOP w0.178: v2(48.29,56.49) 48.77,56.97 48.77,57.01 CON1.30 ; U7.30 54.81,51.49 53.67,52.63 v2(53.67,56.39)
  BOTTOM w0.178: v2(48.29,56.49) 48.78,56.49 48.89,56.39 v2(53.67,56.39)
LCD_VD3: length 32.3
  TOP w0.178: v2(28.68,50.6) 28.68,50.1 29.04,49.74 U6.47 ; v2(46.02,51.56) 46.02,52.06 45.77,52.31 CON1.24
  BOTTOM w0.178: v2(28.68,50.6) 45.06,50.6 v2(46.02,51.56)
LCD_VD4: length 34.2
  TOP w0.178: U6.46 29.54,50.57 28.92,51.19 28.21,51.19 v2(27.81,50.8) ; v2(44.78,51.19) 45.27,51.68 CON1.23
  BOTTOM w0.178: v2(27.81,50.8) 28.19,51.18 28.47,51.18 28.49,51.19 28.92,51.19 29.01,51.1 44.2,51.1 44.28,51.19 v2(44.78,51.19)
LCD_VD5: length 31.2
  TOP w0.178: v2(43.84,51.71) 44.34,51.71 44.35,51.71 44.38,51.71 44.77,52.11 CON1.22 ; v2(29.21,51.7) 30.54,50.37 U6.44
  BOTTOM w0.178: v2(29.21,51.7) 29.27,51.64 43.77,51.64 v2(43.84,51.71)
LCD_VD6: length 30.1
  TOP w0.178: v2(44.07,52.45) 44.07,52.95 44.27,53.15 CON1.21 ; v2(29.84,52.22) 31.04,51.03 U6.43
  BOTTOM w0.178: v2(44.07,52.45) 43.69,52.45 43.31,52.07 30,52.07 v2(29.84,52.22)
LCD_VD7: length 29.3
  TOP w0.178: U6.41 32.04,51.18 v2(30.48,52.74) ; CON1.19 43.27,60.36 43.81,59.82 43.81,53.36 43.66,53.21 43.61,53.21 v2(43.26,52.86)
  BOTTOM w0.178: v2(30.48,52.74) 30.98,52.74 31.21,52.51 42.91,52.51 v2(43.26,52.86)
LCD_VD10: length 25.9
  TOP w0.178: U6.40 32.54,52.62 32.64,52.72 v2(32.64,53.21) ; v2(43.23,53.64) 43.23,54.14 43.29,54.2 43.29,59.2 42.8,59.69 42.8,62.21 42.77,62.24 CON1.18
  BOTTOM w0.178: v2(43.23,53.64) 42.88,53.29 42.87,53.29 42.78,53.21 v2(32.64,53.21)
LCD_VD11: length 28
  TOP w0.178: v2(42.49,53.85) 42.49,54.34 42.54,54.39 42.54,59.06 42.27,59.33 CON1.17 ; v2(31.75,53.31) 32.22,53.78 32.96,53.78 33.54,53.2 U6.38
  BOTTOM w0.178: v2(42.49,53.85) 42.44,53.8 32.23,53.8 v2(31.75,53.31)
LCD_VD12: length 27.2
  TOP w0.178: v2(31.75,54.23) 32.25,54.23 32.3,54.18 33.15,54.18 34.04,53.29 U6.37 ; CON1.16 41.77,58.18 41.91,58.04 v2(41.91,54.37)
  BOTTOM w0.178: v2(41.91,54.37) 41.59,54.37 41.4,54.18 32.3,54.18 32.25,54.23 v2(31.75,54.23)
LCD_VD13: length 24.9
  TOP w0.178: U6.36 34.54,53.34 33.13,54.75 v2(32.64,54.75) ; CON1.15 41.27,55.37 41.27,55.37 v2(41.27,54.87)
  BOTTOM w0.178: v2(32.64,54.75) 41.15,54.75 v2(41.27,54.87)
LCD_VD14: length 26.5
  TOP w0.178: v2(40.64,55.37) 40.64,56.13 40.77,56.26 CON1.14 ; v2(31.75,55.37) 33.27,55.37 35.04,53.61 U6.35
  BOTTOM w0.178: v2(31.75,55.37) 32.25,55.37 32.3,55.32 40.09,55.32 40.14,55.37 v2(40.64,55.37)
LCD_VD15: length 20.2
  TOP w0.178: U6.33 36.04,55.29 v2(35.43,55.89) ; v2(40,56.01) 40,56.52 40.27,56.78 CON1.13
  BOTTOM w0.178: v2(35.43,55.89) 38.73,55.89 38.85,56.01 v2(40,56.01)
LCD_VD19: length 22.9
  TOP w0.178: v2(39.62,57.02) 39.62,57.52 39.77,57.66 CON1.12 ; U6.32 36.54,55.66 35.74,56.46 35.19,56.46 34.63,55.91 v2(34.14,55.91)
  BOTTOM w0.178: v2(34.14,55.91) 34.63,55.91 35.4,56.67 39.27,56.67 v2(39.62,57.02)
LCD_VD20: length 22.6
  TOP w0.178: U6.30 37.54,55.3 35.81,57.02 34.99,57.02 34.63,56.67 v2(34.14,56.67) ; v2(38.99,57.54) 38.99,61.21 38.77,61.43 CON1.10
  BOTTOM w0.178: v2(38.99,57.54) 35.51,57.54 34.63,56.67 v2(34.14,56.67)
LCD_VD21: length 22
  TOP w0.178: v2(34.14,57.48) 36.12,57.48 38.04,55.56 U6.29 ; v2(38.35,58.17) 38.35,58.5 38.48,58.62 38.48,60.07 38.27,60.28 CON1.9
  BOTTOM w0.178: v2(34.14,57.48) 34.63,57.48 35.32,58.17 v2(38.35,58.17)
LCD_VD22: length 21.8
  TOP w0.178: v2(34.14,58.24) 35.99,58.24 39.04,55.19 U6.27 ; v2(37.85,58.8) 37.85,59.3 37.77,59.37 CON1.8
  BOTTOM w0.178: v2(37.85,58.8) 34.7,58.8 v2(34.14,58.24)
LCD_VD23: length 16.2
  TOP w0.178: CON1.7 37.27,57.73 39.54,55.46 U6.26
LCD_VOTCLK: length 22.2
  TOP w0.178: U7.29 55.31,52.13 54.61,52.83 v2(54.61,55.75) ; v2(48.29,55.68) 47.94,56.03 47.94,56.04 47.72,56.25 47.72,56.73 47.77,56.78 CON1.28
  BOTTOM w0.178: v2(48.29,55.68) 48.78,55.68 48.86,55.75 v2(54.61,55.75)
LCD_VSYNC: length 24.3
  TOP w0.178: v2(55.75,55.25) 55.75,53.21 56.31,52.65 56.31,49.43 56.31,49.43 U7.27 ; CON1.26 46.77,56.1 v2(48.13,54.74)
  BOTTOM w0.178: v2(48.13,54.74) 55.24,54.74 v2(55.75,55.25)
LED+: length 50.2
  TOP w0.254: CON2.2 87.17,52.24 87.25,52.32
  TOP w0.381: 81.7,78.14 81.27,77.71 81.27,77.65
  TOP w0.508: C3.2 81.7,78.08 81.27,77.65 D1.2 80.01,76.33 78.87,75.18 78.87,72.14 79.25,71.76 U1.5
  TOP w0.762: 81.7,78.14 82.3,78.74 87.63,78.74 92.58,73.79 92.58,60.58 87.25,55.25 87.25,52.32
LED-: length 32.1
  TOP w0.254: 88.46,51.69 87.67,50.9 CON2.1
  TOP w0.508: R1.1 87.55,72.52 87.17,72.14
  TOP w0.762: 88.46,51.69 88.46,52.26 v1(93.09,56.9) ; v1(87.59,62.32) 87.59,71.72 86.6,72.7 U1.3
  BOTTOM w0.762: v1(93.09,56.9) 93.01,56.9 v1(87.59,62.32)
MD_RSTN: length 17
  TOP w0.178: U7.46 46.81,49.39 46.86,49.45 46.86,50.67 51.27,55.08 CON1.35
TP_EN: length 36.5
  TOP w0.178: U3.1 14.62,57.23 v2(16.21,55.64) 16.85,55.64 17.35,56.13 R15.1 ; v2(17.45,48.06) 17.26,48.25 17.07,48.25 16.4,48.92 Q1.3 17.14,49.02 17.32,49.2 R27.2 ; v2(14.1,39.62) 13.4,39.62 13.35,39.57 U4.1 12.6,39.09 13.08,38.61 17.42,38.61 18.07,37.96 R16.1
  BOTTOM w0.178: v2(14.1,39.62) 14.1,44.7 v2(17.45,48.06) 17.45,54.39 v2(16.21,55.64)
VSYS: length 189.1
  TOP w0.254: 35.71,62 35.71,62.06 36.27,62.61 CON1.5 36.27,65.84 36.07,66.04 35.77,65.74 CON1.4 ; C12.1 25.43,69.85 25.4,69.82 ; 34.92,66.04 34.27,65.38 CON1.1 34.27,61.87 34.8,61.34 35.27,61.81 CON1.3 35.27,65.75 ; 25.4,70.89 25.76,71.25 C13.1 ; CON1.2 34.77,65.25 35.27,65.75 ; R27.1 20.41,48.67 16.95,45.21 C8.2 ; C2.2 74.93,70.61 ; R15.2 18.2,55.6 17.61,55.02 v2(13.51,55.02) ; 35.56,66.04 35.27,65.75 ; 7.49,54.74 7.62,54.86 v2(8.51,54.86)
  TOP w0.305: U4.4 9.19,41.45 9.12,41.53 v2(6.98,41.53) ; R16.2 v2(15.37,37.47)
  TOP w0.381: L1.1 79.12,66.55 71.36,58.79 71.36,57.95 70.87,57.45 R18.2 ; 61.72,70.83 C14.1 62.57,70.61 62.74,70.78 C16.1 C15.1
  TOP w0.762: 34.8,61.34 30.1,61.34 25.4,66.04 C11.1 25.4,70.89 25.04,71.25 17.78,71.25 10.16,63.63 C5.2 10.16,61.32 10.26,61.21 U3.4 9.22,59.11 7.49,57.38 7.49,51.69 9.78,49.4 C8.2 9.78,44.17 10.01,43.94 U4.4 ; 34.92,66.04 36.07,66.04 40.86,70.83 61.72,70.83 61.79,70.89 73.16,70.89 73.44,70.61 C1.1 77.75,70.61 77.94,70.81 U1.6 80.56,69.97 80.16,69.57 L1.1
  BOTTOM w0.254: v2(8.51,54.86) 9.04,54.86 9.19,55.02 v2(13.51,55.02)
  BOTTOM w0.305: v2(15.37,37.47) 11.05,37.47 v2(6.98,41.53)
XM: length 46.1
  TOP w0.178: CON2.37 69.67,45.9 v2(70.23,45.34) ; D4.2 U5.4 100.58,32.51 98.35,34.75 97.6,34.75 v2(88.77,43.57)
  BOTTOM w0.178: v2(88.77,43.57) 87.01,45.34 v2(70.23,45.34)
XP: length 48.3
  TOP w0.178: CON2.39 68.67,45.5 68.33,45.16 v2(68.33,43.69) ; v2(87.5,42.42) 96.65,33.27 98.41,33.27 99.28,32.4 U5.2 99.28,28.81 97.46,26.99 D5.2
  BOTTOM w0.178: v2(87.5,42.42) 86.23,43.69 v2(68.33,43.69)
XPWMTOUT1: length 19.9
  TOP w0.178: CON1.31 49.27,60.19 49.2,60.12 49.2,57.84 49.45,57.58 v2(49.45,57) ; U7.32 53.81,51.37 52.55,52.63 ; 52.55,52.63 53.09,53.16 v2(53.09,57.15) ; 52.55,52.63 C23.2
  BOTTOM w0.178: v2(53.09,57.15) 52.59,57.15 52.44,57 v2(49.45,57)
YM: length 48.8
  TOP w0.178: D2.2 102.23,27.81 101.23,28.81 U5.5 101.23,32.62 v2(90.04,43.82) ; v2(69.16,45.16) 69.16,45.66 69.17,45.66 CON2.38
  BOTTOM w0.178: v2(90.04,43.82) 87.88,45.97 69.98,45.97 v2(69.16,45.16)
YP: length 49.8
  TOP w0.178: v2(88.14,43.05) 97.16,34.04 98.42,34.04 99.93,32.53 U5.3 99.93,27.94 98.98,26.99 D3.2 ; CON2.40 68.17,45.56 67.44,44.83 v2(67.44,44.07)
  BOTTOM w0.178: v2(88.14,43.05) 86.74,44.45 67.82,44.45 v2(67.44,44.07)
N02294: length 5.1
  TOP w0.178: R11.1 100.71,40.89 100.08,40.26 100.08,39.37 100.58,38.86 U5.13
N02298: length 4.9
  TOP w0.178: U5.14 99.93,38.88 99.31,39.5 R12.1
N02404: length 3.9
  TOP w0.381: TP1.1 98.63,38.4 U5.16
N321884: length 3.8
  TOP w0.762: U3.3 13.89,59.11 14.86,60.07 L2.1
N321888: length 5
  TOP w0.254: R3.2 R8.1 11.39,56.25 10.41,57.23 U3.5
N322800: length 4.4
  TOP w0.762: U4.3 15.1,41.45 15.55,41.91 L3.1
N322804: length 5.5
  TOP w0.305: R9.2 R10.1 11.14,37.25 10.01,38.38 U4.5
N323503: length 15.2
  TOP w0.381: U1.1 82.95,70.61 v2(84.45,70.61) ; v2(87.25,75.56) 86.49,76.33 D1.1
  TOP w0.762: U1.1 82.76,69.97 83.16,69.57 L1.2
  BOTTOM w0.381: v2(84.45,70.61) 87.25,73.41 v2(87.25,75.56)
N332264: length 6.9
  TOP w0.178: CON2.3 86.67,51.63 83.57,54.74 R17.1
N334265: length 6.7
  TOP w0.178: R18.1 70.87,56.1 70.67,55.9 CON2.35
N334269: length 6.9
  TOP w0.178: CON2.36 70.17,55.89 69.47,56.59 R19.1
N337628: length 2.3
  TOP w0.381: U7.25 58.94,48.33 58.97,48.35 R25.1
N337730: length 2.6
  TOP w0.305: U7.24 57.77,40.83 58.5,40.09 R23.1
N337734: length 3
  TOP w0.254: R21.1 44.32,38.66 44.77,39.11 45.2,39.11 45.81,39.72 U7.1
N338218: length 4.1
  TOP w0.254: R24.1 40.68,37.81 40.04,38.45 U6.24
N338394: length 1.5
  TOP w0.254: R22.2 44.86,48.22 44.96,48.33 U7.48
N338646: length 2.5
  TOP w0.254: R20.1 26.57,48.22 26.59,48.2 U6.48
N338650: length 1.8
  TOP w0.254: U6.25 41.23,48.2 41.25,48.22 R26.1
N362187: length 3.7
  TOP w0.178: Q1.1 18.56,51.37 19.04,51.84 R29.1 R28.1

## Copper pours and planes (outline as drawn; the poured copper is in the pictures)
GND on TOP: 3.81,0.51 1.48,1.48 0.51,3.81 0.51,79.5 1.48,81.84 3.81,82.8 106.43,82.8 108.76,81.84 109.73,79.5 109.73,3.81 108.76,1.48 106.43,0.51 ; 41 cut-outs
GND on BOTTOM: 3.81,0.51 1.48,1.48 0.51,3.81 0.51,79.5 1.48,81.84 3.81,82.8 106.43,82.8 108.76,81.84 109.73,79.5 109.73,3.81 108.76,1.48 106.43,0.51 ; 6 cut-outs
LED+ on TOP (solid shape): 81.33,76.33 80.51,75.56 79.8,76.19 79.76,76.33 79.8,76.47 80.51,77.09
LED+ on TOP (solid shape): 81.13,77.81 81.27,77.85 81.41,77.81 82.03,77.09 81.27,76.26 80.51,77.09
VSYS on TOP: 34.16,66.48 34.16,60.91 36.07,60.91 36.07,66.48
N323503 on TOP (solid shape): 86.21,76.44 86.25,76.33 86.21,76.21 85.48,75.56 84.67,76.33 85.48,77.09
VDD18 on TOP (solid shape): 28.57,40.7 28.39,39.89 27.65,40.62 27.63,40.7 27.65,40.78 28.39,41.51
VSYS on TOP (solid shape): 10.82,45.29 10.85,45.21 10.82,45.14 10.34,44.7 9.75,45.21 10.34,45.72
VSYS on TOP (solid shape): 62.74,70.71 62.76,70.61 62.74,70.51 62.23,70.05 61.67,70.61 62.23,71.17
N338394 on TOP (solid shape): 45.84,48.33 45.66,47.51 44.92,48.25 44.9,48.33 44.92,48.41 45.66,49.14
N338646 on TOP (solid shape): 28.57,48.2 28.39,47.39 27.65,48.12 27.63,48.2 27.65,48.28 28.39,49.01
N338650 on TOP (solid shape): 40.93,48.28 40.95,48.2 40.93,48.12 40.19,47.39 40.01,48.2 40.19,49.01
N362187 on TOP (solid shape): 18.44,51.42 18.46,51.37 18.44,51.31 17.86,50.77 17.34,51.37 17.86,51.97

Small or netless copper shapes (teardrops, artwork), in the pictures only: 126 on TOP, 5 on BOTTOM

## Text on the board
Ref Des/Silkscreen Top: R4.3V1_5
DIMENSION: 3.OSP | 4.IMMERSION TIN | 5.GOLD FINGERS;OTHERS | LAYER | 1.HASL | 2.ENIG | PCB  SURFACE FINISHES:  [2] | ITOP4412_CONVERTOR_4.3Clasics_v1_5 | BOARD THICKNESS : | DIELECTRIC MATERIAL: FR-4 | SPELL MODE: NO | SHORT NETS: NO | DESIGNER:Tyh | E-MAIL: | COPPER | FR-4 | MATERIAL | WIDTH/SPACE | DIFFERENTIAL IMPEDANCE      LIST | REFERENCE    STACK UP | 1.6mm | ARTW02 | ART01 | CORE | LAYER NAME | IMPEDANCE(OHM) | OPEN WINDOWS: | TEL:010 | DATE:2015-08-04 | 2.1MIL | THICKNESS | 34.1MIL | LAYERS:2 | UNITS: mil | PRECISION | FREQUENGY | Notes: | 1.Drill Tolerance +/-1.95mil[+/-0.05mm] for connector 24mil hole | 2.Filled the via under BGA with bule_oil except test via | 2--ARTWORK BOTTOM | 1--ARTWORK TOP
User.9: FIGURE | SIZE | 12.0 | 16.0 | 24.0 | 126.0 | DRILL CHART: TOP to BOTTOM | ALL UNITS ARE IN MILS | PLATED | QTY | 105 | 182 | 3 | 4
